# Altium PCB PCBPolyESP.PcbDoc (part 1 of 2)
Units mm, origin at the board's own origin, x right, y up, seen from the top; angles counter-clockwise.
Board outline 111.66 x 80.65 mm, 2 copper layers (Top Layer, Bottom Layer); 61 components, 47 nets, 234 pads, 117 vias.
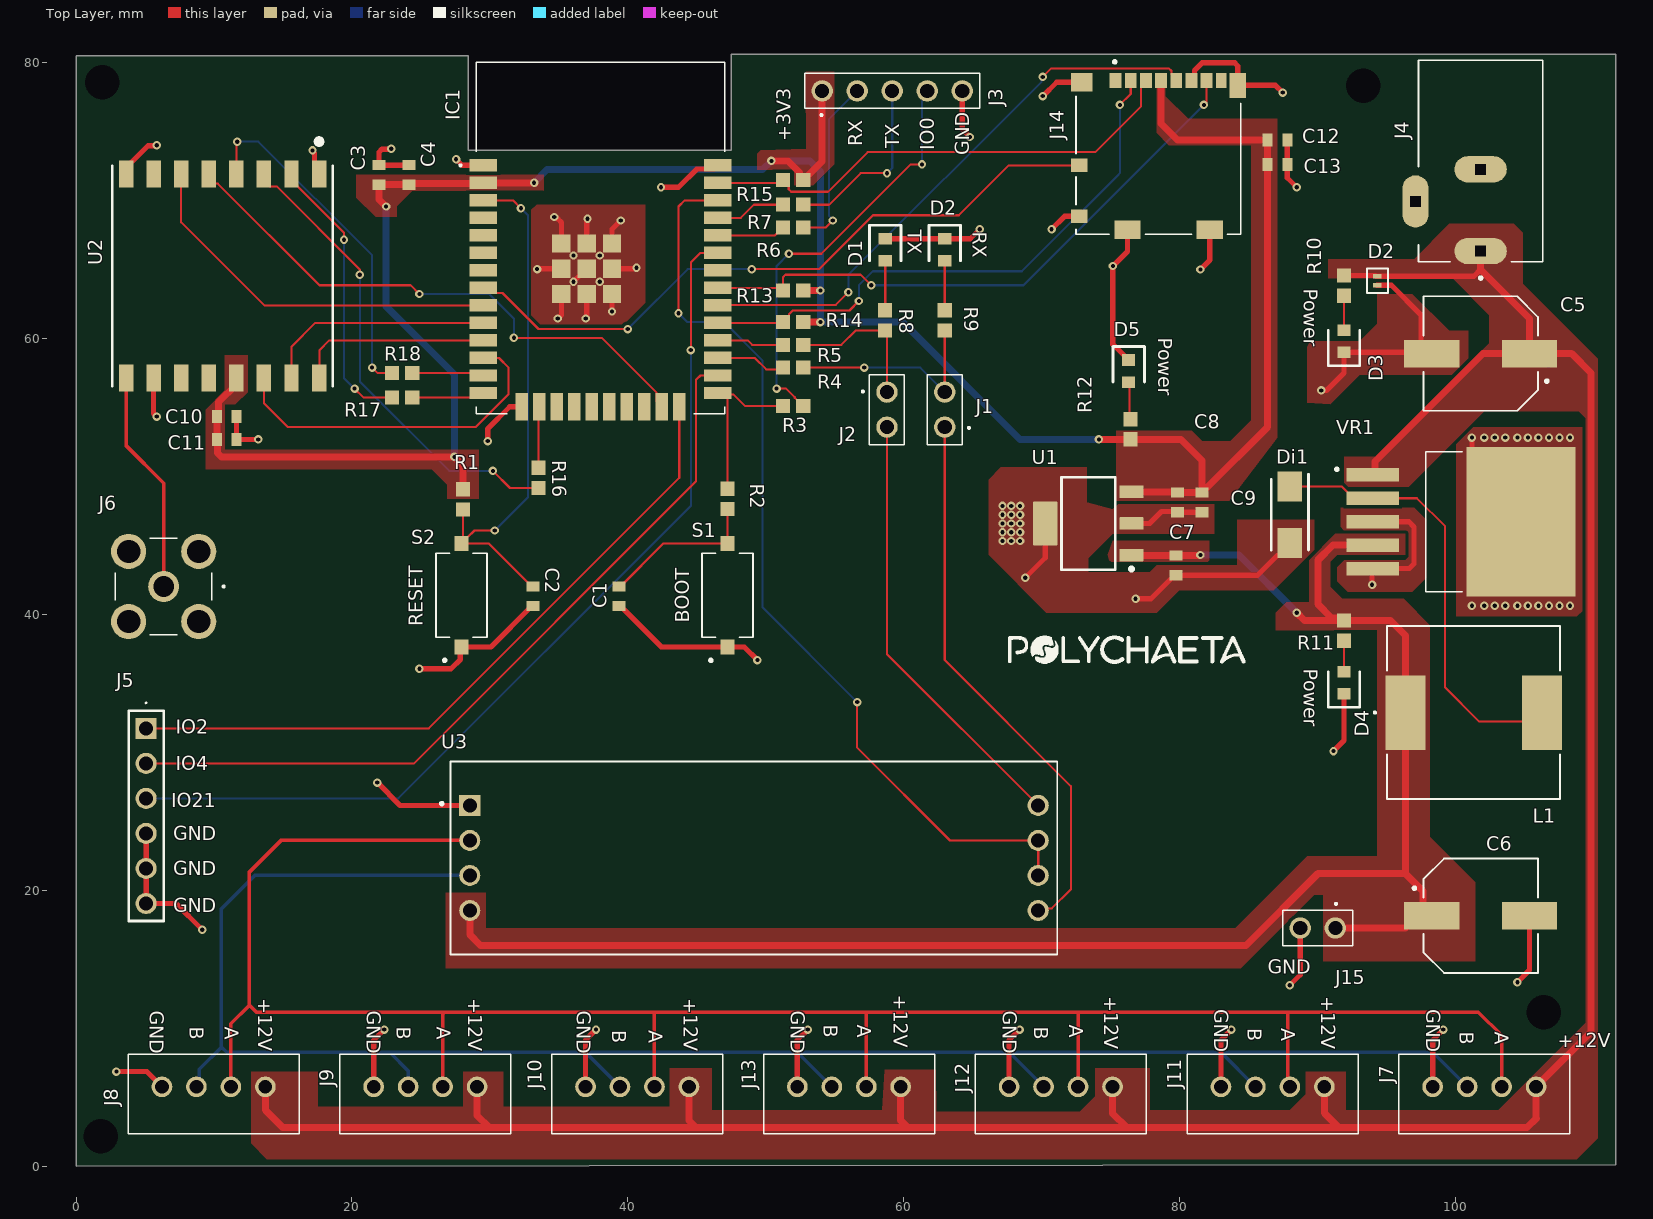
[diagram p0: Top Layer view]
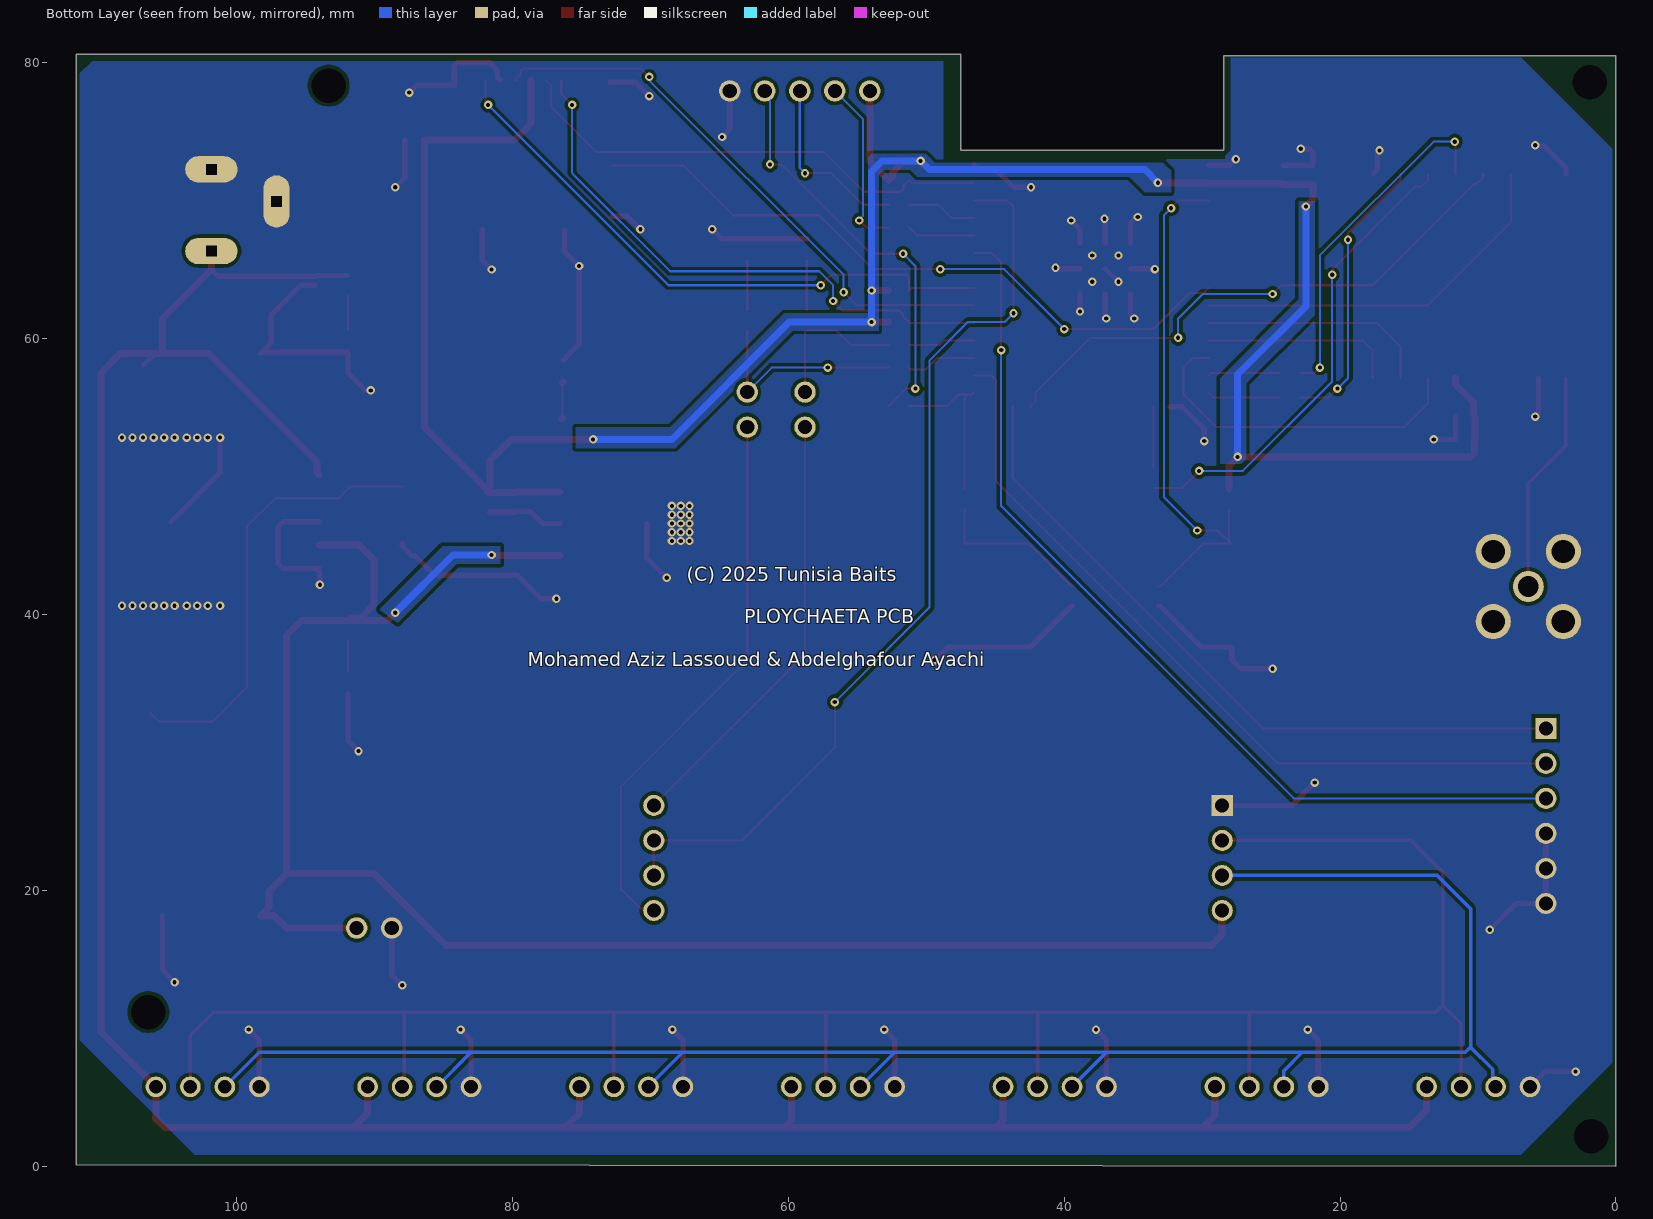
[diagram p1: Bottom Layer view, seen from below]
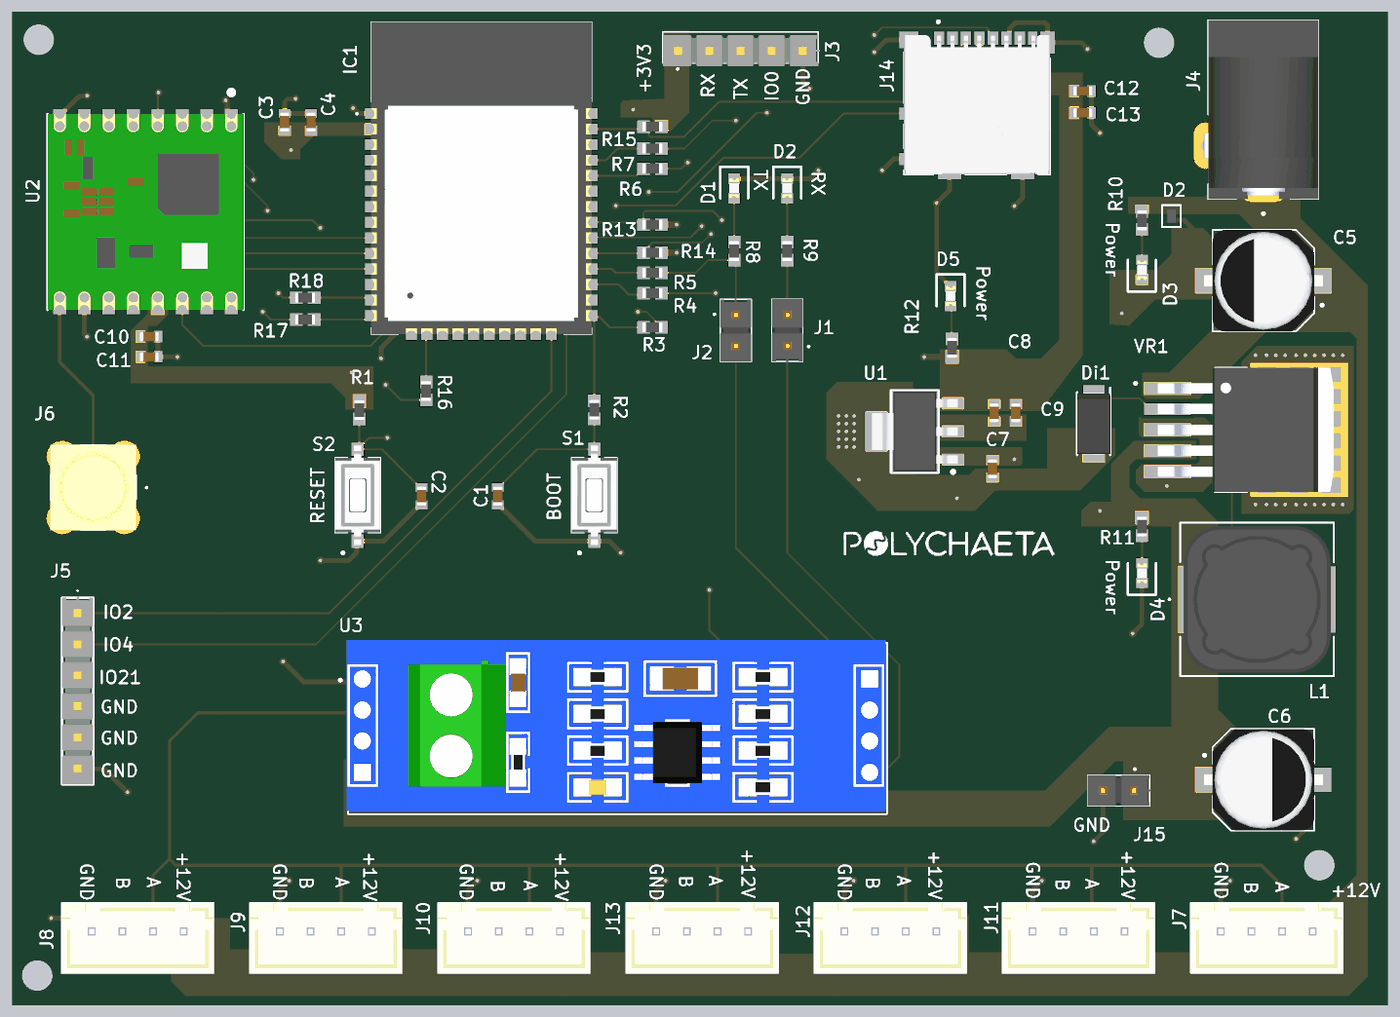
[diagram p2: 3D render of the assembled board from above, using the file's embedded part models]

## Layer stack, top to bottom
Top Solder: solder mask 0.0102, Solder Resist, Dk 3.5
Top Layer: signal copper 0.0356
Dielectric 1: dielectric 0.32, FR-4, Dk 4.8
Bottom Layer: signal copper 0.0356
Bottom Solder: solder mask 0.0102, Solder Resist, Dk 3.5

## Board outline
0,-0.001 0,80.517 28.448,80.517 28.448,73.66 47.498,73.66 47.498,80.645 110.744,80.645 111.662,80.645 111.662,0.089

## Design rules (kind name [scope] priority, off if disabled: settings)
Clearance [All] p1: gap=0.254 ignorepadtopadclearanceinfootprint=FALSE except(0.127: SMDPad-SMDPad)
HoleSize [All] p1: absolutevalues=TRUE maxlimit=3.05 minlimit=0.025 maxpercent=80.000 minpercent=20.000
MinimumSolderMaskSliver [All] p1: minsoldermaskwidth=0.148
PolygonConnect [All] p1: connectstyle=Direct reliefconductorwidth=0.254 reliefentries=4 polygonreliefangle="90 Angle" airgapwidth=0.254
RoutingVias [All] p1: holewidth=0.304 width=0.609 viastyle="Through Hole" minholewidth=0.304 minwidth=0.609 maxholewidth=0.304 maxwidth=0.609
SilkToSolderMaskClearance [IsPad] p1: minsilkscreentomaskgap=0.15 clearancetoexposedcopper=TRUE
SolderMaskExpansion [All] p1: expansion=0.051 istentingtop=FALSE
Width [All] p1: maxlimit=2.54 minlimit=0.152 preferedwidth=0.254 minimp=50.000000 maximp=50.000000 favimp=50.000000
27 further rules are at their usual default settings.

## Classes and differential pairs
component class Storage: C12 C13 J14 R13 R14 R15
component class Rs485: J7 J8 J9 J10 J11 J12 J13 U3
component class MCU: C1 C2 C3 C4 D2 Di1 IC1 J3 J5 R1 R2 R3 R4 R5 R6 R7 R8 R9 S1 S2
component class MainBlockConnection: J1 J2
component class Lora: C10 C11 J6 R16 R17 R18 U2
component class Designator: C5 C6 C7 C8 C9 D2 D3 D4 D5 Di1 J4 J15 L1 R10 R11 R12 U1 VR1

## Components (designator, comment, footprint, x,y, rotation, side; value= is the part's Value field where it differs from the comment)
C1 "0.1uF, 50V" CAPC1608X90N 39.37,41.327 r90 top
C2 "1uF, 35V" CAPC1608X90N 33.147,41.327 r90 top
C3 "0.1uF, 50V" CAPC1608X90N 21.971,71.882 r270 top
C4 "10uF, 10V" CAPC1608X90N 24.13,71.882 r90 top
C5 "EEEFT1V331AP" CAP_EEEFT1V331AP 101.854,58.928 r180 top
C6 "EEEFP1C331AP" CAP_EEEFP1C331AP 101.854,18.161 r0 top
C7 "4.7uF, 16V" CAPC1608X90N 79.756,43.561 r90 top
C8 "10uF, 10V" CAPC1608X90N 81.661,48.133 r90 top
C9 "10uF, 10V" CAPC1608X90N 79.883,48.133 r90 top
C10 "0.1uF, 10V" CAPC1608X90N 10.922,54.356 r180 top
C11 "10uF, 10V" CAPC1608X90N 10.922,52.705 r180 top
C12 "0.1uF, 10V" CAPC1608X90N 87.122,74.422 r180 top
C13 "10uF, 10V" CAPC1608X90N 87.122,72.644 r180 top
D1 "HSMG-C190" LEDC1608X90N 58.674,66.459 r270 top (schematic designator LED1)
D2 "HSMG-C190" LEDC1608X90N 62.992,66.459 r270 top (schematic designator LED2)
D2 "AQ3045-01ETG" SOD882 94.361,64.206 r90 top
D3 "Red" LEDC1608X90N 91.948,59.817 r90 top
D4 "Red" LEDC1608X90N 91.948,35.052 r90 top
D5 "Red" LEDC1608X90N 76.327,57.658 r270 top
Di1 "SS34-MS" DIOM5127X241N 88.011,47.244 r270 top (schematic designator D1)
IC1 "ESP32-WROOM-32D__4MB_PS_" ESP32WROOM32D4MBPS 38.027,67.321 r0 top
J1 "TSW-102-07-F-S" TSW-102-XX-YY-S 62.992,53.594 r90 top
J2 "TSW-102-07-F-S" TSW-102-XX-YY-S 58.801,56.134 r270 top
J3 "TSW-105-07-F-S" TSW-105-XX-YY-S 54.102,77.978 r0 top
J4 "EJ503A" MPD_EJ503A 101.854,72.898 r180 top
J5 "TSW-106-07-F-S" TSW10607FS 5.08,31.75 r270 top
J6 "901-144-8RFX" 9011448RFX 6.35,42.037 r0 top
J7 "B4B-XH-A_LF__SN_" B4BXHALFSN 105.878,5.757 r180 top
J8 "B4B-XH-A_LF__SN_" B4BXHALFSN 13.723,5.757 r180 top
J9 "B4B-XH-A_LF__SN_" B4BXHALFSN 29.082,5.757 r180 top
J10 "B4B-XH-A_LF__SN_" B4BXHALFSN 44.441,5.757 r180 top
J11 "B4B-XH-A_LF__SN_" B4BXHALFSN 90.519,5.757 r180 top
J12 "B4B-XH-A_LF__SN_" B4BXHALFSN 75.16,5.757 r180 top
J13 "B4B-XH-A_LF__SN_" B4BXHALFSN 59.801,5.757 r180 top
J14 "104031-0811" MOLEX_104031-0811 78.486,73.279 r180 top
J15 "TSW-102-07-F-S" TSW-102-XX-YY-S 91.313,17.272 r180 top
L1 "CDRH127/LDNP-470MC" IND_CDRH127/LDNP-470MC_SUM 101.346,32.893 r0 top
R1 "10K" RESC1607X60N 28.067,48.36 r90 top
R2 "27R" RESC1607X60N 47.244,48.387 r270 top
R3 "27R" RESC1607X60N 51.997,55.118 r0 top
R4 "0R" RESC1607X60N 51.997,57.912 r0 top
R5 "0R" RESC1607X60N 51.997,59.563 r0 top
R6 "0R" RESC1607X60N 51.997,68.072 r0 top
R7 "0R" RESC1607X60N 51.997,69.723 r0 top
R8 "1K" RESC1607X60N 58.674,61.341 r270 top
R9 "1K" RESC1607X60N 62.992,61.341 r270 top
R10 "1K" RESC1607X60N 91.948,63.854 r90 top
R11 "1K" RESC1607X60N 91.948,38.835 r90 top
R12 "1K" RESC1607X60N 76.454,53.44 r270 top
R13 "10K" RESC1607X60N 51.997,63.5 r0 top
R14 "10K" RESC1607X60N 51.997,61.214 r0 top
R15 "10K" RESC1607X60N 51.997,71.501 r0 top
R16 "27R" RESC1607X60N 33.528,49.911 r270 top
R17 "27R" RESC1607X60N 23.649,55.753 r180 top
R18 "27R" RESC1607X60N 23.649,57.531 r180 top
S1 "TS09-63-25-WT-160-SMT-TR" SW_TS09-63-25-WT-160-SMT-TR 47.244,41.402 r90 top
S2 "TS09-63-25-WT-160-SMT-TR" SW_TS09-63-25-WT-160-SMT-TR 27.94,41.402 r90 top
U1 "TL1963A-33DCYR" DCY0004A_N 73.406,46.609 r180 top
U2 "RFM95W-868S2" XCVR_RFM95W-868S2 10.62,64.55 r270 top
U3 "MAX485_MODULE_5V_LOGIC_TLL_TO_RS-485_CONVERTER" MODULE_MAX485_MODULE_5V_LOGIC_TLL_TO_RS-485_CONVERTER 49.149,22.352 r0 top
VR1 "LM2596S-5.0" TO170P1524X483-6N 100.425,46.736 r0 top

## Footprints (in the part's own frame and the unit in brackets; to place one, negate y for a bottom-side part, rotate by r counter-clockwise, add the part's x,y. Pads: shape width x height; smd on the part's side, far side on the other; paste and mask are expansions set on the pad)
9011448RFX [mm]
  round 2.25 hole 1.5: 1(0,0)
  round 2.55 hole 1.7: 2(-2.54,-2.54) 3(2.54,-2.54) 4(2.54,2.54) 5(-2.54,2.54)
  silkscreen extent -3.5,-3.5 4.4,3.5, body extent -3.5,-3.5 3.5,3.5, height 9.55
B4BXHALFSN [mm]
  round 1.5 hole 1: 1(0,0) 2(2.5,0) 3(5,0) 4(7.5,0)
  silkscreen extent -2.45,-2.35 9.95,3.4, body extent -2.45,-2.35 9.95,3.4, height 7.52
CAP_EEEFP1C331AP [mm]
  rect 4x2 smd: 1(-3.55,0) 2(3.55,0)
  silkscreen extent -4.9,-4.15 4.15,4.15, body extent -4.85,-4.15 4.85,4.15, height 10.2
CAP_EEEFT1V331AP [mm]
  rect 4x2 smd: 1(-3.55,0) 2(3.55,0)
  silkscreen extent -4.9,-4.15 4.15,4.15, body extent -4.85,-4.15 4.85,4.15, height 10.2
CAPC1608X90N [mm]
  rect 0.73x0.94 smd: 1(-0.71,0) 2(0.71,0)
  body extent -0.8,-0.4 0.8,0.4, height 0.9
DCY0004A_N [mm] "SOT223, 4-Leads, Body 6.7x3.7mm, Pitch 2.3mm, IPC Medium Density"
  rrect11% 1.75x0.9 smd: 1(-3.125,2.3) 2(-3.125,0) 3(-3.125,-2.3)
  rrect6% 1.75x3.2 smd: 4(3.125,0)
  silkscreen extent -3.25,-3.35 1.95,3.42, body extent -3.5,-3.25 3.5,3.25, height 1.62
DIOM5127X241N [mm]
  rect 2.2x1.75 smd: 1(-2.05,0) 2(2.05,0)
  silkscreen extent -2.93,-1.35 2.55,1.35, body extent -2.55,-1.35 2.55,1.35, height 2.41
ESP32WROOM32D4MBPS [mm]
  rect 2x0.9 smd: 1(-8.5,5.26) 2(-8.5,3.99) 3(-8.5,2.72) 4(-8.5,1.45) 5(-8.5,0.18) 6(-8.5,-1.09) 7(-8.5,-2.36) 8(-8.5,-3.63) 9(-8.5,-4.9) 10(-8.5,-6.17) 11(-8.5,-7.44) 12(-8.5,-8.71) 13(-8.5,-9.98) 14(-8.5,-11.25) 25(8.5,-11.25) 26(8.5,-9.98) 27(8.5,-8.71) 28(8.5,-7.44) 29(8.5,-6.17) 30(8.5,-4.9) 31(8.5,-3.63) 32(8.5,-2.36) 33(8.5,-1.09) 34(8.5,0.18) 35(8.5,1.45) 36(8.5,2.72) 37(8.5,3.99) 38(8.5,5.26)
  rect 0.9x2 smd: 15(-5.715,-12.25) 16(-4.445,-12.25) 17(-3.175,-12.25) 18(-1.905,-12.25) 19(-0.635,-12.25) 20(0.635,-12.25) 21(1.905,-12.25) 22(3.175,-12.25) 23(4.445,-12.25) 24(5.715,-12.25)
  rect 1.33x1.33 smd: 39(-2.835,-0.405) 40(-1,-0.405) 41(0.835,-0.405) 42(0.835,-2.24) 43(-1,-2.24) 44(-2.835,-2.24) 45(-2.835,-4.075) 46(-1,-4.075) 47(0.835,-4.075)
  silkscreen extent -10.2,-12.75 9,12.75, body extent -9,-12.75 9,12.75, height 3.1
IND_CDRH127/LDNP-470MC_SUM [mil]
  rect 114x213 smd: 1(-195,0) 2(195,0)
  silkscreen extent -285,-247 247,247, body extent -236,-236 236,236, height 315
LEDC1608X90N [mm]
  rect 0.85x0.95 smd: 1(-0.8,0) 2(0.8,0)
  silkscreen extent -1.78,-1.14 0.8,1.14, body extent -0.83,-0.4 0.77,0.4, height 0.8
MODULE_MAX485_MODULE_5V_LOGIC_TLL_TO_RS-485_CONVERTER [mm]
  rect 1.53x1.53 hole 1.02: 1(-20.6,3.81)
  round 1.53 hole 1.02: 2(-20.6,1.27) 3(-20.6,-1.27) 4(-20.6,-3.81) 5(20.62,-3.81) 6(20.62,-1.27) 7(20.62,1.27) 8(20.62,3.81)
  silkscreen extent -22.73,-7 22,7, body extent -22.13,-6.76 21.87,7.24, height 11
MOLEX_104031-0811 [mm]
  rect 0.85x1.1 smd: 1(3.105,-5.45) 2(2.005,-5.45) 3(0.905,-5.45) 4(-0.195,-5.45) 5(-1.295,-5.45) 6(-2.395,-5.45) 7(-3.495,-5.45)
  rect 0.75x1.1 smd: 8(-4.545,-5.45)
  rect 1.2x1 smd: 9(5.74,0.7) 10(5.74,4.4)
  rect 1.55x1.35 smd: G1(5.565,-5.325)
  rect 1.17x1.8 smd: G2(-5.755,-5.1)
  rect 1.9x1.35 smd: G3(-3.73,5.375) G4(2.24,5.375)
  silkscreen extent -5.97,-6.9 5.97,5.7, body extent -5.98,-5.72 5.97,5.69, height 1.43
MPD_EJ503A [mm]
  oval 3.8x1.9 hole 0.76 square: 1(0,6.54) 2(0,0.61)
  oval 1.9x3.8 hole 0.76 square: 3(4.73,2.94)
  silkscreen extent -4.5,-7.31 4.5,8.59, body extent -4.5,-7.31 4.88,7.31, height 11
RESC1607X60N [mm]
  rect 1.04x1.02 smd: 1(-0.735,0) 2(0.735,0)
  body extent -0.8,-0.4 0.8,0.4, height 0.55
SOD882 [mm]
  rect 0.35x0.6 smd: 1(-0.325,0) 2(0.325,0)
  silkscreen extent -0.89,-0.76 0.89,0.76, body extent -0.54,-0.34 0.54,0.34, height 0.44
SW_TS09-63-25-WT-160-SMT-TR [mm]
  rect 1.1x1 smd: 1(-3.75,0) 2(3.75,0)
  silkscreen extent -4.82,-1.85 3.05,1.85, body extent -4.05,-1.85 4.05,1.85, height 2.5
TO170P1524X483-6N [mm]
  rect 3.79x0.99 smd: 1(-6.4,3.4) 2(-6.4,1.7) 3(-6.4,0) 4(-6.4,-1.7) 5(-6.4,-3.4)
  rect 7.88x10.84 smd paste-6: 6(4.35,0)
  silkscreen extent -9.1,-5.08 0.09,5.08, body extent -7.18,-5.08 7.18,5.08, height 4.65
TSW10607FS [mm]
  rect 1.53x1.53 hole 1.02: 1(0,0)
  round 1.53 hole 1.02: 2(2.54,0) 3(5.08,0) 4(7.62,0) 5(10.16,0) 6(12.7,0)
  silkscreen extent -1.9,-1.27 13.97,1.27, body extent -1.42,-1.27 13.95,1.27, height 7.26
TSW-102-XX-YY-S [mm]
  round 1.55 hole 1.02: 1(0,0) 2(2.54,0)
  silkscreen extent -1.27,-1.8 3.81,1.27, body extent -1.39,-1.28 3.82,1.26, height 9.16
TSW-105-XX-YY-S [mm]
  round 1.55 hole 1.02: 1(0,0) 2(2.54,0) 3(5.08,0) 4(7.62,0) 5(10.16,0)
  silkscreen extent -1.27,-1.8 11.43,1.27, body extent -1.27,-1.52 11.56,1.02, height 5.85
XCVR_RFM95W-868S2 [mm]
  rect 1.95x1.05 smd: 1(-7.4,7) 2(-7.4,5) 3(-7.4,3) 4(-7.4,1) 5(-7.4,-1) 6(-7.4,-3) 7(-7.4,-5) 8(-7.4,-7) 9(7.4,-7) 10(7.4,-5) 11(7.4,-3) 12(7.4,-1) 13(7.4,1) 14(7.4,3) 15(7.4,5) 16(7.4,7)
  silkscreen extent -10.04,-8 8,8, body extent -8,-8 8,8, height 1.8

## Part data
C1 C3: library part CL10B104KB8NNNL, "CAP CER 0.1UF 50V X7R 0603", Arrow Part Number=CL10A106MP8NNNC, Manufacturer_Name=SAMSUNG, Mouser Part Number=187-CL10A106MP8NNNC, Arrow Price/Stock=https://www.arrow.com/en/products/cl10a106mp8nnnc/samsung-electro-mechanics?utm_currency=USD&region=europe, Datasheet Link=https://componentsearchengine.com/Datasheets/2/CL10A106MP8NNNC.pdf, Height=0.9mm, Manufacturer_Part_Number=CL10B104KB8NNNL, Mouser Price/Stock=https://www.mouser.co.uk/ProductDetail/Samsung-Electro-Mechanics/CL10A106MP8NNNC?qs=X6jEic%2FHinAgjcVTZfg7UA%3D%3D
C2: library part CL10A105KL8NNNC, "Ceramic Capacitor, Multilayer, Ceramic, 35V, 10% +Tol, 10% -Tol, X5R, +-15% TC, 1uF, Surface Mount, 0603 inch", Manufacturer=Samsung, Voltage Rating (DC)=35V, Category="Ceramic Capacitors", ComponentLink1Description=https://datasheet.ciiva.com/25773/cl10a105kl8nnnc-25773809.pdf?src-supplier=Digikey, ComponentLink1URL=https://datasheet.ciiva.com/25773/cl10a105kl8nnnc-25773809.pdf?src-supplier=Digikey, ComponentLink2Description=https://datasheet.ciiva.com/16202/clseries-16202344.pdf?src-supplier=Future+Electronics, ComponentLink2URL=https://datasheet.ciiva.com/16202/clseries-16202344.pdf?src-supplier=Future+Electronics, Height=900um, Lead Free=5697LeadFree, Manufacturer Part Number=CL10A105KL8NNNC, Material=4241ConductorMaterial, Pricing 1="1=0,13, 10=0,073, 100=0,044, 1000=0,03277 (USD)", RoHS=Yes, Stock 1=11037, Supplier 1=Digikey
C4 C8 C9 C11 C13: library part CL10A106MP8NNNC, "CAP CER 10UF 10V X5R 0603", Manufacturer_Name=SAMSUNG, Mouser Part Number=187-CL10A106MP8NNNC, Arrow Part Number=CL10A106MP8NNNC, Arrow Price/Stock=https://www.arrow.com/en/products/cl10a106mp8nnnc/samsung-electro-mechanics?utm_currency=USD&region=europe, Datasheet Link=https://componentsearchengine.com/Datasheets/2/CL10A106MP8NNNC.pdf, Height=0.9mm, Manufacturer_Part_Number=CL10A106MP8NNNC, Mouser Price/Stock=https://www.mouser.co.uk/ProductDetail/Samsung-Electro-Mechanics/CL10A106MP8NNNC?qs=X6jEic%2FHinAgjcVTZfg7UA%3D%3D
C5: "CAP ALUM 330UF 20% 35V SMD", Package="RADIAL-2 Panasonic", Check_prices=https://www.snapeda.com/parts/EEE-FT1V331AP/Panasonic/view-part/?ref=eda, MF="Panasonic Electronic", MP=EEE-FT1V331AP, SnapEDA_Link=https://www.snapeda.com/parts/EEE-FT1V331AP/Panasonic/view-part/?ref=snap
C6: "CAP ALUM 330UF 20% 16V SMD", Package="RADIAL-2 Panasonic", Check_prices=https://www.snapeda.com/parts/EEE-FP1C331AP/Panasonic/view-part/?ref=eda, MF="Panasonic Electronic", MP=EEE-FP1C331AP, SnapEDA_Link=https://www.snapeda.com/parts/EEE-FP1C331AP/Panasonic/view-part/?ref=snap
C7: library part CL10A475KO8NNNC, "CAP CER 4,7UF 16V X5R 0603", Arrow Part Number=CL10A106MP8NNNC, Manufacturer_Name=SAMSUNG, Mouser Part Number=187-CL10A106MP8NNNC, Arrow Price/Stock=https://www.arrow.com/en/products/cl10a106mp8nnnc/samsung-electro-mechanics?utm_currency=USD&region=europe, Datasheet Link=https://componentsearchengine.com/Datasheets/2/CL10A106MP8NNNC.pdf, Height=0.9mm, Manufacturer_Part_Number=CL10A475KO8NNNC, Mouser Price/Stock=https://www.mouser.co.uk/ProductDetail/Samsung-Electro-Mechanics/CL10A106MP8NNNC?qs=X6jEic%2FHinAgjcVTZfg7UA%3D%3D
C10 C12: library part C0603C104K8RACTU, "CAP CER 0.1UF 10V X7R 0603", Arrow Part Number=CL10A106MP8NNNC, Manufacturer_Name=KEMET, Mouser Part Number=187-CL10A106MP8NNNC, Arrow Price/Stock=https://www.arrow.com/en/products/cl10a106mp8nnnc/samsung-electro-mechanics?utm_currency=USD&region=europe, Datasheet Link=https://componentsearchengine.com/Datasheets/2/CL10A106MP8NNNC.pdf, Height=0.9mm, Manufacturer_Part_Number=C0603C104K8RACTU, Mouser Price/Stock=https://www.mouser.co.uk/ProductDetail/Samsung-Electro-Mechanics/CL10A106MP8NNNC?qs=X6jEic%2FHinAgjcVTZfg7UA%3D%3D
D1 D2: "Green LED 0603 (1608 Metric)", Manufacturer_Name="Avago Technologies", Mouser Part Number=630-HSMG-C190, Datasheet Link=https://docs.broadcom.com/docs/AV02-0551EN, Height=0.9mm, Manufacturer_Part_Number=HSMG-C190, Mouser Price/Stock=https://www.mouser.co.uk/ProductDetail/Broadcom-Avago/HSMG-C190?qs=YDL0qNrpDT605sxOaps8VQ%3D%3D
D2: "TVS DIODE 5.3VWM 12VC SOD882", LCSC Part Number=C3710326, Manufacturer=Littelfuse, Max Breakdown Voltage=9V, Max Operating Temperature=150°C, Min Breakdown Voltage=6.8V, Min Operating Temperature=-55°C, Non-rep Peak Rev Power Dis-Max=40W, Package Body Material=Plastic, Package Shape=Rectangular, Package Style="CHIP CARRIERMeter", Rep Pk Reverse Voltage-Max=5.3V, Supplier Part Number=F9321CT-ND, Category="TVS Diodes", ComponentLink1Description=https://datasheet.ciiva.com:443/pdfs/VipMasterIC/IC/LFSI/LFSI-S-A0007892042/LFSI-S-A0007892042-1.pdf?src-supplier=IHS+Markit, ComponentLink1URL=https://datasheet.ciiva.com:443/pdfs/VipMasterIC/IC/LFSI/LFSI-S-A0007892042/LFSI-S-A0007892042-1.pdf?src-supplier=IHS+Markit, ComponentLink2Description=https://www.littelfuse.com/~/media/electronics/datasheets/tvs_diode_arrays/littelfuse_tvs_diode_array_aq3045_datasheet.pdf.pdf?src-supplier=Digikey, ComponentLink2URL=https://www.littelfuse.com/~/media/electronics/datasheets/tvs_diode_arrays/littelfuse_tvs_diode_array_aq3045_datasheet.pdf.pdf?src-supplier=Digikey, ComponentLink3Description=http://www.littelfuse.com/~/media/electronics/datasheets/tvs_diode_arrays/littelfuse_tvs_diode_array_aq3045_datasheet.pdf.pdf?src-supplier=Digikey, ComponentLink3URL=http://www.littelfuse.com/~/media/electronics/datasheets/tvs_diode_arrays/littelfuse_tvs_diode_array_aq3045_datasheet.pdf.pdf?src-supplier=Digikey, Diode Element Material=SILICON, Diode Type="TRANS VOLTAGE SUPPRESSOR", Manufacturer Part Number=AQ3045-01ETG, Number of Elements=1, Pins=2, Polarity=Bidirectional, Pricing="1=0.5, 10=0.391, 100=0.2344, 500=0.217, 1000=0.14756, 2000=0.13585, 5000=0.1302 (USD)", Reach SVHC Compliant=Yes, Reference Standard=AEC-Q101, RoHS=Yes, RoHS Compliant=Yes, Stock=21664, Supplier=Digikey, Surface Mount=Yes, Technology=AVALANCHE, Terminal Form="No Lead", Terminal Position=BOTTOM
D3 D4 D5: library part HSMS-C190, "Red LED 0603 (1608 Metric)", Manufacturer_Name="Avago Technologies", Manufacturer_Part_Number=HSMG-C190, Mouser Part Number=630-HSMG-C190, Datasheet Link=https://docs.broadcom.com/docs/AV02-0551EN, Height=0.9mm, Mouser Price/Stock=https://www.mouser.co.uk/ProductDetail/Broadcom-Avago/HSMG-C190?qs=YDL0qNrpDT605sxOaps8VQ%3D%3D
Di1: "Schottky Diode", Manufacturer_Name=MSKSEMI, Datasheet Link=https://datasheet.lcsc.com/lcsc/2202131930_MSKSEMI-SS34-MS_C2836396.pdf, Height=2.41mm, Manufacturer_Part_Number=SS34-MS
IC1: "Integrated Circuit", Manufacturer_Name="Espressif Systems", Manufacturer_Part_Number="ESP32-WROOM-32D (4MB PS)", Mouser Part Number=356-ESPWROOM3200PS3, Datasheet Link=https://www.mouser.com/datasheet/2/891/esp32-wroom-32d_esp32-wroom-32u_datasheet_en-1365844.pdf, Height=3.2mm, Mouser Price/Stock=https://www.mouser.co.uk/ProductDetail/Espressif-Systems/ESP32-WROOM-32D-4MB-PS?qs=GBLSl2Akirs5uooPY1MBgw%3D%3D
J1 J2 J15: "Connector", Manufacturer_Name=SAMTEC, Mouser Part Number=200-TSW10207FS, Arrow Part Number=TSW-102-07-F-S, Arrow Price/Stock=https://www.arrow.com/en/products/tsw-102-07-f-s/samtec?utm_currency=USD&region=europe, Datasheet Link=http://suddendocs.samtec.com/prints/tsw-xxx-xx-xxx-x-xx-xxx-mkt.pdf, Manufacturer_Part_Number=TSW-102-07-F-S, Mouser Price/Stock=https://www.mouser.co.uk/ProductDetail/Samtec/TSW-102-07-F-S?qs=hzq9O0YpnZuC7JuvEqrjIA%3D%3D
J3: "Connector", Manufacturer_Name=SAMTEC, Mouser Part Number=200-TSW10507FS, Arrow Part Number=TSW-105-07-F-S, Arrow Price/Stock=https://www.arrow.com/en/products/tsw-105-07-f-s/samtec?region=europe, Datasheet Link=http://suddendocs.samtec.com/prints/tsw-xxx-xx-xxx-x-xx-xxx-mkt.pdf, Manufacturer_Part_Number=TSW-105-07-F-S, Mouser Price/Stock=https://www.mouser.co.uk/ProductDetail/Samtec/TSW-105-07-F-S?qs=rU5fayqh%252BE0rjSr2FD4jkw%3D%3D
J4: "Power Barrel Connector Jack 2.10mm ID (0.083), 5.50mm OD (0.217) Through Hole, Right Angle", Package=None, Availability="In Stock", Check_prices=https://www.snapeda.com/parts/EJ503A/MPD+%2528Memory+Protection+Devices%2529/view-part/?ref=eda, MF=MPD, MP=EJ503A, Price=None, Purchase-URL=https://pricing.snapeda.com/search?q=EJ503A&ref=eda, SnapEDA_Link=https://www.snapeda.com/parts/EJ503A/MPD+%2528Memory+Protection+Devices%2529/view-part/?ref=snap
J5: "Connector", Manufacturer_Name=SAMTEC, Mouser Part Number=200-TSW10607FS, Arrow Part Number=TSW-106-07-F-S, Arrow Price/Stock=https://www.arrow.com/en/products/tsw-106-07-f-s/samtec?region=nac, Datasheet Link=http://suddendocs.samtec.com/prints/tsw-xxx-xx-xxx-x-xx-xxx-mkt.pdf, Height=8.38mm, Manufacturer_Part_Number=TSW-106-07-F-S, Mouser Price/Stock=https://www.mouser.co.uk/ProductDetail/Samtec/TSW-106-07-F-S?qs=rU5fayqh%252BE1Xwj0%2Fe2Xn%2Fw%3D%3D
J6: "Connector", Manufacturer_Name=Amphenol, Mouser Part Number=523-901-144-8RFX, Arrow Part Number=901-144-8RFX, Arrow Price/Stock=https://www.arrow.com/en/products/901-144-8rfx/amphenol-rf?region=europe, Datasheet Link=https://componentsearchengine.com/Datasheets/1/901-144-8RFX.pdf, Height=9.53mm, Manufacturer_Part_Number=901-144-8RFX, Mouser Price/Stock=https://www.mouser.co.uk/ProductDetail/Amphenol-RF/901-144-8RFX?qs=jpOL8GWAqat%252BbPjbt8toTg%3D%3D
J7 J8 J9 J10 J11 J12 J13: "Connector", Arrow Part Number=B4B-XH-A(LF)(SN), Manufacturer_Name="JST (JAPAN SOLDERLESS TERMINALS)", Mouser Part Number=306-B4BXHALFSN, Arrow Price/Stock=https://www.arrow.com/en/products/b4b-xh-a-lf-sn/jst-manufacturing?utm_currency=USD&region=europe, Datasheet Link=https://datasheet.lcsc.com/szlcsc/JST-Sales-America-B4B-XH-A-LF-SN_C144395.pdf, Height=7mm, Manufacturer_Part_Number=B4B-XH-A(LF)(SN), Mouser Price/Stock=https://www.mouser.co.uk/ProductDetail/JST-Commercial/B4B-XH-ALFSN?qs=cdbOS8ANM9CfC08d%252BywhFw%3D%3D
J14: "Surface Mount Micro SD Card Connector, with Push In Termination", Package=None, Check_prices=https://www.snapeda.com/parts/104031-0811/Molex/view-part/?ref=eda, MF=Molex, MP=104031-0811, SnapEDA_Link=https://www.snapeda.com/parts/104031-0811/Molex/view-part/?ref=snap
L1: "Inductor Power Shielded Drum Core 47uH 20% 1KHz Ferrite 4.1A 0.078Ohm DCR T/R", Package="Non Standard Sumida", Check_prices=https://www.snapeda.com/parts/CDRH127/LDNP-470MC/Sumida/view-part/?ref=eda, MF="Sumida Corporation", MP=CDRH127/LDNP-470MC, SnapEDA_Link=https://www.snapeda.com/parts/CDRH127/LDNP-470MC/Sumida/view-part/?ref=snap
R1 R13 R14 R15: library part RC0603JR-0710KL, "RES 10K OHM 5% 1/10W 0603", Case/Package=0603, Manufacturer=Yageo, Max Operating Temperature=155°C, Max Power Dissipation=100mW, Min Operating Temperature=-55°C, Resistance=10kR, Temperature Coefficient=100ppm/°C, Tolerance=5%, Voltage Rating (AC)=50V, Category="Chip SMD Resistors", ComponentLink1Description=https://datasheet.ciiva.com/2452/pyu-rc-group-51-rohs-l-10-2452848.pdf?src-supplier=Digikey, ComponentLink1URL=https://datasheet.ciiva.com/2452/pyu-rc-group-51-rohs-l-10-2452848.pdf?src-supplier=Digikey, Lead Free=5697LeadFree, Manufacturer Part Number=RC0603JR-0710KL, Number of Terminations=2, Pricing 1="1=0,1, 10=0,008, 50=0,0072, 100=0,0061, 500=0,0051 (USD)", Reach SVHC Compliant=4187SVHC, RoHS=Yes, RoHS Compliant=Yes, Series=RC, Stock 1=50431, Supplier 1=Digikey
R2 R3 R16 R17 R18: library part RC0603JR-0727RL, "RES 27 OHM 5% 1/10W 0603", Manufacturer=Yageo, Voltage Rating (AC)=50V, Category="Chip SMD Resistors", ComponentLink1Description=https://datasheet.ciiva.com/7746/443971-7746479.pdf?src-supplier=Element14, ComponentLink1URL=https://datasheet.ciiva.com/7746/443971-7746479.pdf?src-supplier=Element14, Lead Free=5697LeadFree, Manufacturer Part Number=RC0603JR-0727RL, Pricing 1="1=0,1, 10=0,008, 50=0,0072, 100=0,0061, 500=0,00562, 1000=0,0051 (USD)", RoHS=Yes, Stock 1=235857, Supplier 1=Digikey
R4 R5 R6 R7: library part RC0603JR-070RL, "RES 0 OHM JUMPER 1/10W 0603", Case Code (Imperial)=0603, Case Code (Metric)=1608, Manufacturer=Yageo, Max Operating Temperature=155°C, Max Power Dissipation=100mW, Min Operating Temperature=-55°C, Package Quantity=5000, Resistance=0mR, Resistance Tolerance=5%, Resistor Type="Thick Film", Temperature Coefficient=200ppm/°C, Tolerance=1%, Voltage Rating=50V, Case/Package=0603, Category="Chip SMD Resistors", ComponentLink1Description=https://datasheet.ciiva.com/11808/pyu-r-int-6-11808700.pdf?src-supplier=Rs, ComponentLink1URL=https://datasheet.ciiva.com/11808/pyu-r-int-6-11808700.pdf?src-supplier=Rs, ComponentLink2Description=https://datasheet.ciiva.com/22747/443971-22747530.pdf?src-supplier=Element14, ComponentLink2URL=https://datasheet.ciiva.com/22747/443971-22747530.pdf?src-supplier=Element14, ComponentLink3Description=https://datasheet.ciiva.com/12555/rc0603-272842-12555254.pdf?src-supplier=Mouser, ComponentLink3URL=https://datasheet.ciiva.com/12555/rc0603-272842-12555254.pdf?src-supplier=Mouser, ComponentLink4Description=https://datasheet.ciiva.com/7746/1738695-7746421.pdf?src-supplier=Element14, ComponentLink4URL=https://datasheet.ciiva.com/7746/1738695-7746421.pdf?src-supplier=Element14, ComponentLink5Description=https://datasheet.ciiva.com/7746/1738695-7746422.pdf?src-supplier=Element14, ComponentLink5URL=https://datasheet.ciiva.com/7746/1738695-7746422.pdf?src-supplier=Element14, Construction=Rectangular, Contact Plating=Tin,Matte, Depth=0.8mm, Features="Moisture Resistant", Height=0.45mm, Lead Free=5697LeadFree, Length=1.6mm, Manufacturer Part Number=RC0603JR-070RL, Military Standard=Not, Number of Pins=2, Number of Terminations=2, Packaging="Tape and Reel", Power Rating=100mW, Pricing 1="1=0,1, 10=0,01, 25=0,008, 50=0,0068, 100=0,0059, 250=0,00496, 500=0,00436, 1000=0,00384, 5000=0,00292, 10000=0,00262, 15000=0,00246, 25000=0,00229, 35000=0,00218, 50000=0,00208, 125000=0,00185, 250000=0,00171, 500000=0,00159 (USD)", Reach SVHC Compliant=Unknown, RoHS=Yes, RoHS Compliant=Yes, Series=RC, Size Code=0603, Stock 1=2438419, Supplier 1=Digikey, Technology="THICK FILM", Termination=SMD/SMT, Voltage Rating (DC)=50V, Width=0.8mm
R8 R9 R10 R11 R12: library part RT0603BRD071KL, "Fixed Resistor, Thin Film, 0.1W, 1000ohm, 75V, 0.1% +/-Tol, 25ppm/Cel, Surface Mount, 0603", Case Code (Imperial)=0603, Case Code (Metric)=1608, Manufacturer=Yageo, Max Operating Temperature=155°C, Max Power Dissipation=100mW, Min Operating Temperature=-55°C, Package Quantity=5000, Resistance=1kR, Temperature Coefficient=25ppm/°C, Voltage Rating=75V, Voltage Rating (DC)=50V, Case/Package=0603, Category="Chip SMD Resistors", ComponentLink1Description=https://datasheet.ciiva.com/11819/0900766b8079c86e-11819652.pdf?src-supplier=Rs, ComponentLink1URL=https://datasheet.ciiva.com/11819/0900766b8079c86e-11819652.pdf?src-supplier=Rs, ComponentLink2Description=https://datasheet.ciiva.com/5624/pyu-rt-1-to-0-05-rohs-l-4-5624759.pdf?src-supplier=Mouser, ComponentLink2URL=https://datasheet.ciiva.com/5624/pyu-rt-1-to-0-05-rohs-l-4-5624759.pdf?src-supplier=Mouser, Contact Plating=Tin,Lead, Depth=0.8mm, Features="Moisture Resistant", Height=0.022inch, Lead Free=5697LeadFree, Length=0.063inch, Manufacturer Part Number=RT0603BRD071KL, Mount="Surface Mount", Number of Terminations=2, Packaging="Tape and Reel", Power Rating=100mW, Pricing 1="1=0,15, 10=0,108, 50=0,0868, 100=0,0775, 500=0,06018, 1000=0,05202 (USD)", RoHS=Yes, RoHS Compliant=Yes, Series=RT, Size Code=0603, Stock 1=60333, Supplier 1=Digikey, Technology="THIN FILM", Termination=SMD/SMT, Width=0.031inch
S1 S2: "SWITCH TACTILE SPST-NO 0.05A 12V", Package=None, Check_prices=https://www.snapeda.com/parts/TS09-63-25-WT-160-SMT-TR/Same+Sky/view-part/?ref=eda, MF="Same Sky", MP=TS09-63-25-WT-160-SMT-TR, SnapEDA_Link=https://www.snapeda.com/parts/TS09-63-25-WT-160-SMT-TR/Same+Sky/view-part/?ref=snap
U1: "IC REG LINEAR 3.3V 1.5A SOT223-4", Case/Package=SOP, Dropout Voltage1-Max=550mV, Dropout Voltage1-Nom=340mV, Input Voltage Absolute-Max=20V, LCSC Part Number=C181262, Manufacturer="Texas Instruments", Min Input Voltage=3.8V, Operating Temperature, TJ-Max=125°C, Operating Temperature, TJ-Min=-40°C, Output Current1-Max=1.5A, Output Voltage1-Max=3.4V, Output Voltage1-Min=3.2V, Output Voltage1-Nom=3.3V, Package Body Material=Plastic, Package Shape=Rectangular, Package Style="SMALL OUTLINEMeter", Peak Reflow Temperature (Cel)=260°C, Supplier Part Number=296-24897-1-ND, Voltage Tolerance-Max=3%, Adjustability=FIXED, Category="Voltage Regulators - Linear", Channels=1, ComponentLink1Description=https://www.ti.com:443/lit/ds/symlink/tl1963a.pdf?src-supplier=IHS+Markit, ComponentLink1URL=https://www.ti.com:443/lit/ds/symlink/tl1963a.pdf?src-supplier=IHS+Markit, ComponentLink2Description=https://datasheet.ciiva.com/2046/-2046068.pdf?src-supplier=Digikey, ComponentLink2URL=https://datasheet.ciiva.com/2046/-2046068.pdf?src-supplier=Digikey, Height - Seated (Max)=1.8mm, JESD-30 Code=R-PDSO-G4, JESD-609 Code=e3, Length=6.5mm, Line Regulation-Max=0.01%, Load Regulation-Max=0.07%, Manufacturer Part Number=TL1963A-33DCYR, Max Supply Voltage=20V, Moisture Sensitivity Level=2, Number of Outputs=1, Packaging="Tape and Reel", Pins=4, Pricing="1=2.91, 10=2.614, 25=2.4712, 100=2.1417, 250=2.03188, 500=1.8232, 1000=1.53764 (USD)", Qualification Status="Not Qualified", Reach SVHC Compliant=Yes, Regulator Type="FIXED POSITIVE SINGLE OUTPUT LDO REGULATOR", RoHS=Yes, RoHS Compliant=Yes, Stock=4105, Supplier=Digikey, Surface Mount=Yes, Technology=BIPOLAR, Terminal Finish=Tin, Terminal Form="Gull Wing", Terminal Pitch=2.3mm, Terminal Position=DUAL, Width=3.5mm
U2: "General ISM < 1GHz LoRaâ„¢ Transceiver Module 868MHz Antenna Not Included Surface Mount", Package="Non Standard RF Solutions", Availability="In Stock", Check_prices=https://www.snapeda.com/parts/RFM95W-868S2/RF+Solutions/view-part/?ref=eda, MF=RF, MP=RFM95W-868S2, Price=None, Purchase-URL=https://pricing.snapeda.com/search?q=RFM95W-868S2&ref=eda, SnapEDA_Link=https://www.snapeda.com/parts/RFM95W-868S2/RF+Solutions/view-part/?ref=snap
U3: "5V MAX485 TTL To RS485 Converter Module Board for Arduino", Package=Package, Availability="Not in stock", Check_prices=https://www.snapeda.com/parts/MAX485%20Module%205V%20logic%20TLL%20to%20RS-485%20converter/e-Gizmo+Mechatronix+Central/view-part/?ref=eda, MF="e-Gizmo Mechatronix Central", MP="MAX485 Module 5V logic TLL to RS-485 converter", Price=None, SnapEDA_Link=https://www.snapeda.com/parts/MAX485%20Module%205V%20logic%20TLL%20to%20RS-485%20converter/e-Gizmo+Mechatronix+Central/view-part/?ref=snap
VR1: "SIMPLE SWITCHERÂ® 4.5V to 40V, 3A Low Component Count Step-Down Regulator", Package="TO-263-5 Texas Instruments", Check_prices=https://www.snapeda.com/parts/LM2596S-5.0/NOPB/Texas+Instruments/view-part/?ref=eda, MF="Texas Instruments", MP=LM2596S-5.0/NOPB, SnapEDA_Link=https://www.snapeda.com/parts/LM2596S-5.0/NOPB/Texas+Instruments/view-part/?ref=snap

## Free pads (board coordinates)
  round 1.524 hole 2.5 unplated: 3(1.778,2.159) 3(1.905,78.613) 3(93.345,78.359) 3(106.426,11.176)

## Via types
v1: diameter 0.609, hole 0.304, Top Layer to Bottom Layer, tented both sides, 117 vias

## Nets (pads, with @x,y where several pads share a name; then routed paths per layer and width w, separated by ;. In a path a pad name is that pad's centre, name@x,y a point inside that pad or via, vN(x,y) a via of type N, cw(c..) or ccw(c..) an arc to the next point about the centre after c; other vN are vias at no path point)
+3V3: C3.2 C4.1 C8.2 C9.2 C10.2 C11.2 C12.2 C13.2 IC1.2 J3.1 J14.4 R1.2 R12.2 R13.2 R14.2 R15.2 U1.3 U2.13 | length 182.8
  Top Layer w0.508: U2.13 11.62,56.7 10.323,55.403 10.323,54.467 C10.2 C11.2 10.243,52.674 10.243,51.733 10.541,51.435 v1(27.432,51.435) 27.432,51.408 28.067,50.773 R1.2 ; v1(22.479,69.596) 21.971,70.104 C3.2 C4.1 24.205,71.247 29.463,71.247 IC1.2 v1(33.21,71.311) v1@33.274,71.247 ; v1(50.419,72.898) 51.613,72.898 52.466,72.045 52.466,71.757 52.722,71.501 R15.2 52.742,71.501 54.102,72.861 J3.1 ; R14.2 v1(53.975,61.214) ; R13.2 v1(53.975,63.5) ; v1(74.168,52.705) R12.2 80.137,52.705 81.661,51.181 C8.2 ; U1.3@76.564,48.876 79.85,48.876 C9.2 C8.2 ; J14.4 78.681,75.624 79.883,74.422 C12.2 C13.2 86.412,53.594 81.877,49.059 81.877,48.954 81.766,48.843 C8.2
  Bottom Layer w0.508: v1(22.479,69.596) 22.479,62.357 27.432,57.404 v1(27.432,51.435) ; v1(33.21,71.311) 34.162,72.263 49.784,72.263 v1(50.419,72.898) 53.213,72.898 53.975,72.136 v1(53.975,63.5) v1(53.975,61.214) 59.944,61.214 68.453,52.705 v1(74.168,52.705)
+5V: C6.1 C7.2 J15.1 L1.1 R11.2 U1.1 U3.4 VR1.4 | length 132.9
  Top Layer w0.508: U3.4 28.549,16.79 29.337,16.002 84.836,16.002 90.043,21.209 96.393,21.209 ; U1.1@76.55,44.29 79.737,44.29 C7.2 81.482,44.271 v1(81.534,44.323) ; v1(88.519,40.132) 89.081,39.57 R11.2 ; J15.1 96.415,17.272 97.304,18.161 C6.1 97.663,18.802 97.663,19.939 96.393,21.209 ; VR1.4 91.137,45.036 90.043,43.942 90.043,40.767 91.048,39.762 91.756,39.762 R11.2 ; R11.2 95.304,39.57 96.393,38.481 L1.1 96.393,21.209
  Bottom Layer w0.508: v1(81.534,44.323) 84.328,44.323 v1(88.519,40.132)
+12V: C5.1 D2.2@94.361,64.531 J4.1 J7.1 J8.1 J9.1 J10.1 J11.1 J12.1 J13.1 R10.2 VR1.1 | length 207.6
  Top Layer w0.381: R10.2 94.209,64.589 94.267,64.531 94.361,64.531 101.361,64.531 101.854,65.024 ; C5.1@105.943,58.928 C5.1@106.752,58.118
  Top Layer w0.508: J8.1 13.723,4.057 14.986,2.794 29.972,2.794 ; J9.1 29.082,3.684 29.972,2.794 ; J10.1 44.441,3.311 44.958,2.794 ; J13.1 59.801,3.318 60.325,2.794 ; J12.1 75.16,3.834 76.2,2.794 ; J11.1 90.519,3.842 91.567,2.794 ; VR1.1@94.034,50.136 94.19,50.291 94.19,51.095 102.022,58.928 C5.1 ; J4.1 101.854,65.024 105.404,61.474 C5.1 ; 29.972,2.794 44.958,2.794 ; 44.958,2.794 60.325,2.794 ; 60.325,2.794 76.2,2.794 ; 76.2,2.794 91.567,2.794 ; 91.567,2.794 105.221,2.794 105.887,3.46 105.878,3.469 J7.1 109.855,9.734 109.855,57.531 108.458,58.928 105.943,58.928 C5.1
A: J7.2 J8.2 J9.2 J10.2 J11.2 J12.2 J13.2 U3.2 | length 155.7
  Top Layer w0.254: J8.2 11.223,10.334 12.573,11.684 ; J9.2 26.582,11.027 26.731,11.176 ; U3.2 14.859,23.622 12.573,21.336 12.573,11.684 ; J10.2 41.941,11.176 ; J13.2 57.301,11.176 ; J12.2 72.66,11.176 ; J11.2 87.849,5.927 87.849,11.176 ; J7.2 103.378,9.486 101.688,11.176 87.849,11.176 ; 12.573,11.684 13.081,11.176 26.731,11.176 ; 26.731,11.176 41.941,11.176 ; 41.941,11.176 57.301,11.176 ; 57.301,11.176 72.66,11.176 ; 72.66,11.176 87.849,11.176
ANT: J6.1 U2.9 | length 16.2
  Top Layer w0.254: U2.9 3.62,52.26 6.35,49.53 J6.1
B: J7.3 J8.3 J9.3 J10.3 J11.3 J12.3 J13.3 U3.3 | length 141.4
  Bottom Layer w0.254: J8.3 8.929,5.963 8.929,7.024 10.541,8.636 ; J9.3 24.082,6.906 22.733,8.255 ; U3.3 12.954,21.082 10.541,18.669 10.541,8.636 ; J10.3 36.943,8.255 ; J13.3 52.302,8.255 ; J12.3 67.662,8.255 ; J11.3 83.021,8.255 ; J7.3 98.38,8.255 83.021,8.255 ; 10.541,8.636 10.922,8.255 22.733,8.255 ; 22.733,8.255 36.943,8.255 ; 36.943,8.255 52.302,8.255 ; 52.302,8.255 67.662,8.255 ; 67.662,8.255 83.021,8.255
BTN_GPIO0: C1.2 R2.2 S1.2 | length 11.7
  Top Layer w0.152: C1.2 39.475,42.037 42.59,45.152 S1.2 R2.2
CON_GPIO0: J3.4 R3.2 | length 30.5
  Top Layer w0.152: v1(50.8,56.388) 51.489,56.388 52.112,55.765 52.112,55.728 52.722,55.118 R3.2 ; v1(51.689,66.167) 54.037,66.167 60.514,72.644 v1(61.341,72.644)
  Bottom Layer w0.152: v1(50.8,56.388) 50.8,65.278 v1(51.689,66.167) ; v1(61.341,72.644) 61.341,77.219 61.722,77.6 J3.4
EN: C2.2 IC1.3 R1.1 S2.2 | length 39.2
  Top Layer w0.152: R1.1 S2.2@28.067,45.329 ; IC1.3 31.686,70.041 v1(32.258,69.469) ; v1(30.353,46.101) 28.889,46.101 28.414,45.626 28.364,45.626 S2.2@28.067,45.329 ; C2.2 33.042,42.037 29.927,45.152 S2.2 27.94,45.202 S2.2@28.067,45.329
  Bottom Layer w0.152: v1(30.353,46.101) 32.766,48.514 32.766,68.961 v1(32.258,69.469)
ESP_RX: J1.2 R4.2 R9.2 | length 15.5
  Top Layer w0.152: R4.2 v1(57.15,57.912) ; J1.2 R9.2
  Bottom Layer w0.152: v1(57.15,57.912) 61.214,57.912 J1.2
ESP_TX: J2.1 R5.2 R8.2 | length 10.9
  Top Layer w0.152: R5.2 55.499,59.563 56.542,60.606 R8.2 58.801,60.479 J2.1
GND: C1.1 C2.1 C3.1 C4.2 C5.2 C6.2 C7.1 C8.1 C9.1 C10.1 C11.1 C12.1 C13.1 D1.1 D2.1 D3.1 D4.1 D5.1 Di1.2 IC1.1 IC1.15 IC1.38 IC1.39 IC1.40 IC1.41 IC1.42 IC1.43 IC1.44 IC1.45 IC1.46 IC1.47 J3.5 J4.2 J4.3 J5.4 J5.5 J5.6 J6.2 J6.3 J6.4 J6.5 J7.4 J8.4 J9.4 J10.4 J11.4 J12.4 J13.4 J14.6 J14.10 J14.G1 J14.G2 J14.G3 J14.G4 J15.2 S1.1 S2.1 U1.2 U1.4 U2.1 U2.8 U2.10 U3.1 VR1.3 VR1.5 VR1.6 | length 228.8
  Top Layer w0.381: v1(2.921,6.858) 5.122,6.858 J8.4 ; U2.8 3.62,72.4 5.217,73.997 5.798,73.997 v1(5.842,74.041) ; J5.4 J5.5 J5.6 7.239,19.05 v1(9.144,17.145) ; U2.10 5.62,54.578 v1(5.842,54.356) ; C10.1 C11.1 v1(13.208,52.705) ; v1(17.145,73.66) 17.145,73.598 17.286,73.458 17.286,72.285 U2.1 ; J9.4 21.582,9.144 v1(22.344,9.906) ; v1(21.844,27.813) 23.495,26.162 U3.1 ; v1(22.86,73.787) 22.825,73.752 22.194,73.752 21.971,73.529 C3.1 C4.2 ; v1(24.892,36.068) 27.178,36.068 27.864,36.754 27.864,37.576 S2.1 30.077,37.652 33.042,40.617 C2.1 ; v1(27.559,73.025) 28.003,72.581 IC1.1 ; v1(29.845,52.578) 29.845,53.467 31.449,55.071 IC1.15 ; v1@33.401,65.024 v1(33.43,65.053) 33.458,65.081 IC1.44 ; v1(34.925,61.468) 35.192,61.735 IC1.45 ; v1@34.925,68.707 35.192,68.44 IC1.39 ; v1(36.068,64.135) 36.081,64.135 IC1.43 ; J10.4 36.941,9.144 v1(37.703,9.906) ; v1(36.957,61.468) 37.027,61.538 IC1.46 ; IC1.40 37.027,68.65 v1(37.084,68.707) ; v1(38.862,61.976) IC1.47 ; IC1.42 40.57,65.081 v1(40.64,65.151) ; IC1.41 38.862,67.945 v1(39.497,68.58) ; C1.1 39.475,40.617 42.44,37.652 S1.1 48.454,37.652 v1(49.403,36.703) ; v1(42.418,70.993) 43.688,70.993 45.016,72.321 46.267,72.321 IC1.38 ; J13.4 52.3,9.144 v1(53.062,9.906) ; D1.1 62.992,67.259 64.846,67.259 v1(65.532,67.945) ; J3.5 64.262,75.184 v1(64.815,74.631) ; J12.4 67.66,9.144 v1(68.422,9.906) ; v1(68.834,42.672) 70.281,44.119 U1.4 ; v1(70.104,77.597) 71.111,78.604 J14.G1 ; v1(70.739,67.945) 71.673,68.879 J14.10 ; J14.G4 76.246,66.34 v1(75.184,65.278) 75.184,59.601 76.042,58.743 76.042,58.693 76.277,58.458 D5.1 ; U1.2 77.851,46.609 78.709,47.467 79.839,47.467 C9.1 C8.1 ; v1(76.835,41.148) 77.948,41.148 79.651,42.851 C7.1 85.668,42.851 87.101,44.284 87.327,44.284 88.011,44.969 Di1.2 ; J14.6 81.111,78.959 81.111,79.463 81.658,80.01 84.018,80.01 84.241,79.787 J14.G2 86.975,78.379 v1(87.503,77.851) ; v1(81.534,65.024) 82.216,65.706 J14.G3 ; J11.4 83.019,9.144 v1(83.781,9.906) ; C12.1 C13.1 87.832,71.68 v1(88.519,70.993) ; v1(88.011,13.123) 88.773,13.885 J15.2 ; v1(90.297,56.261) 90.678,56.261 91.948,57.531 D3.1 C5.2@98.215,59.017 ; v1(91.186,30.103) 91.948,30.865 D4.1 ; v1(93.98,42.164) 93.98,43.031 94.285,43.336 VR1.5@95.152,43.336 ; VR1.5 VR1.5@95.152,43.336 ; VR1.3 96.647,46.736 97.028,46.355 97.028,43.688 96.676,43.336 VR1.5@95.152,43.336 ; D2.1@94.361,63.881 95.377,63.881 97.536,61.722 97.536,59.696 C5.2@98.215,59.017 ; C5.2 C5.2@98.215,59.017 ; J7.4 98.378,9.144 v1(99.14,9.906) ; J4.2@100.976,72.288 J4.2 ; v1(101.219,52.832) 101.219,50.292 VR1.6 ; v1(104.521,13.335) 105.404,14.218 C6.2
  other v1: 101.219,40.64 102.108,40.64 102.87,40.64 103.632,40.64 104.521,40.64 105.283,40.64 106.045,40.64 106.807,40.64 107.569,40.64 108.331,40.64 67.183,45.339 67.818,45.339 68.453,45.339 67.183,45.974 67.818,45.974 68.453,45.974 67.183,46.609 67.818,46.609 68.453,46.609 67.183,47.244 67.818,47.244 68.453,47.244 67.183,47.879 67.818,47.879 68.453,47.879 102.108,52.832 102.87,52.832 103.632,52.832 104.521,52.832 105.283,52.832 106.045,52.832 106.807,52.832 107.569,52.832 108.331,52.832 37.973,64.135 36.068,66.04 37.973,66.04 34.671,68.834
GPIO0: IC1.25 R2.1 R3.1 | length 12.1
  Top Layer w0.152: IC1.25 46.616,56.071 46.721,55.966 IC1.25@46.936,55.966 ; R2.1 47.244,55.697 46.975,55.966 IC1.25@46.936,55.966 ; R3.1 48.514,55.118 47.666,55.966 IC1.25@46.936,55.966
GPIO2: IC1.24 J5.1 | length 51.3
  Top Layer w0.152: J5.1 25.582,31.75 43.742,49.91 IC1.24
GPIO4: IC1.26 J5.2 | length 57.4
  Top Layer w0.152: J5.2 24.511,29.21 44.958,49.657 44.958,57.023 45.276,57.341 IC1.26
GPIO21: IC1.33 J5.3 | length 68.2
  Top Layer w0.152: v1(44.577,59.182) 44.577,65.532 45.276,66.231 IC1.33
  Bottom Layer w0.152: J5.3 23.368,26.67 44.577,47.879 v1(44.577,59.182)
NetD1_1: Di1.1 L1.2 VR1.2 | length 32.5
  Top Layer w0.152: Di1.1 91.767,49.294 92.625,48.436 VR1.2 97.233,48.436 99.276,46.393 99.276,34.709 101.727,32.258 105.664,32.258 L1.2
NetD3_2: D3.2 R10.1 | length 2.5
  Top Layer w0.152: D3.2 R10.1
NetD4_2: D4.2 R11.1 | length 2.2
  Top Layer w0.152: D4.2 R11.1
NetD5_2: D5.2 R12.1 | length 2.7
  Top Layer w0.152: R12.1@76.391,54.238 D5.2@76.391,56.794
  Top Layer w0.508: D5.2 D5.2@76.391,56.794 ; R12.1@76.391,54.238 R12.1
NetIC1_8: IC1.8 J14.9 | length 49.4
  Top Layer w0.152: IC1.8 29.901,63.317 30.917,63.317 33.528,60.706 v1(40.005,60.706) ; v1(49.002,65.049) 53.873,65.049 57.785,68.961 64.008,68.961 67.626,72.579 J14.9
  Bottom Layer w0.152: v1(40.005,60.706) 44.348,65.049 v1(49.002,65.049)
NetIC1_9: IC1.9 U2.6 | length 27.9
  Top Layer w0.152: U2.6 7.62,68.453 13.652,62.421 IC1.9
NetIC1_10: IC1.10 U2.15 | length 16.9
  Top Layer w0.152: U2.15 15.62,59.435 17.336,61.151 IC1.10
NetIC1_11: IC1.11 U2.16 | length 14.2
  Top Layer w0.152: U2.16 17.653,57.183 17.653,59.182 18.352,59.881 IC1.11
NetIC1_12: IC1.12 U2.14 | length 25.3
  Top Layer w0.152: U2.14 13.62,55.341 15.367,53.594 28.967,53.594 31.369,55.996 31.369,57.912 30.67,58.611 IC1.12
NetIC1_13: IC1.13 R18.1 | length 5.2
  Top Layer w0.152: R18.1 29.337,57.531 IC1.13
NetIC1_14: IC1.14 R17.1 | length 5.3
  Top Layer w0.152: R17.1 29.209,55.753 IC1.14
NetIC1_16: IC1.16 R16.1 | length 4.4
  Top Layer w0.152: R16.1 33.528,55.017 IC1.16
NetIC1_23: IC1.23 U2.5 | length 41.2
  Top Layer w0.152: U2.5 9.62,71.699 10.069,71.25 10.284,71.25 17.653,63.881 24.257,63.881 v1(24.892,63.246) ; v1(31.75,60.071) 38.119,60.071 42.098,56.092 42.098,55.445 IC1.23
  Bottom Layer w0.152: v1(24.892,63.246) 29.972,63.246 31.75,61.468 v1(31.75,60.071)
NetIC1_27: IC1.27 R4.1 | length 5.1
  Top Layer w0.152: IC1.27 49.212,58.611 50.038,57.785 51.135,57.785 R4.1
NetIC1_28: IC1.28 R5.1 | length 4.9
  Top Layer w0.152: IC1.28 48.704,59.881 49.022,59.563 R5.1
NetIC1_29: IC1.29 J14.2 R14.1 | length 41.5
  Top Layer w0.152: IC1.29 51.199,61.151 R14.1 51.308,61.26 51.318,61.26 51.706,61.648 51.706,61.797 51.963,62.054 56.085,62.054 v1(56.769,62.738) ; v1(75.692,76.962) 76.481,77.751 J14.2
  Bottom Layer w0.152: v1(56.769,62.738) 56.769,63.889 57.777,64.897 68.588,64.897 75.565,71.874 75.565,71.882 75.692,72.009 v1(75.692,76.962)
NetIC1_30: IC1.30 J14.5 | length 41.8
  Top Layer w0.152: IC1.30 46.566,62.46 55.094,62.46 v1(56.007,63.373) ; v1(70.104,78.994) 70.719,79.609 79.243,79.609 79.436,79.416 79.436,79.203 79.781,78.858 J14.5
  Bottom Layer w0.152: v1(56.007,63.373) 56.007,64.643 70.017,78.653 70.017,78.907 v1(70.104,78.994)
NetIC1_31: IC1.31 J14.7 R13.1 | length 44
  Top Layer w0.152: IC1.31 51.071,63.691 R13.1 51.262,64.47 51.435,64.643 56.896,64.643 v1(57.658,63.881) ; v1(81.788,76.962) 81.981,77.155 J14.7
  Bottom Layer w0.152: v1(57.658,63.881) 68.707,63.881 v1(81.788,76.962)
NetIC1_36: IC1.36 U3.6 U3.7 | length 67.6
  Top Layer w0.152: v1(43.688,61.849) 43.688,69.596 44.133,70.041 IC1.36 ; v1(56.642,33.655) 56.642,30.353 63.373,23.622 U3.7 U3.6
  Bottom Layer w0.152: v1(43.688,61.849) 44.323,61.214 46.99,61.214 49.784,58.42 49.784,40.513 v1(56.642,33.655)
NetIC1_37: IC1.37 J14.3 R15.1 | length 35.9
  Top Layer w0.152: IC1.37 51.072,71.311 R15.1 51.682,71.081 51.682,70.836 51.857,70.661 54.532,70.661 57.404,73.533 73.914,73.533 77.236,76.855 77.236,78.384 J14.3
NetJ1_1: J1.1 U3.5 | length 40.3
  Top Layer w0.152: J1.1 62.992,36.703 72.136,27.559 72.136,20.066 70.762,18.692 69.919,18.692 U3.5
NetJ2_2: J2.2 U3.8 | length 32
  Top Layer w0.152: J2.2 58.801,37.13 U3.8
NetJ3_2: J3.2 R6.2 | length 12.7
  Top Layer w0.152: R6.2 54.356,68.072 v1(54.864,68.58)
  Bottom Layer w0.152: v1(54.864,68.58) 54.864,68.644 54.61,68.898 54.61,75.946 J3.2
NetJ3_3: J3.3 R7.2 | length 13.1
  Top Layer w0.152: R7.2 54.61,69.723 56.896,72.009 v1(58.801,72.009)
  Bottom Layer w0.152: v1(58.801,72.009) 59.182,72.39 J3.3
NetLED1_2: D1.2 R8.1 | length 3.6
  Top Layer w0.152: R8.1 D1.2
NetLED2_2: D2.2@62.992,65.659 R9.1 | length 3.6
  Top Layer w0.152: R9.1 D2.2@62.992,65.659
NetR16_2: R16.2 U2.3 | length 34.4
  Top Layer w0.152: U2.3 13.62,71.5 14.069,71.051 14.552,71.051 20.574,65.029 v1(20.574,64.643) ; v1(30.226,50.419) 31.469,49.176 R16.2
  Bottom Layer w0.152: v1(20.574,64.643) 20.599,64.618 20.599,56.942 20.599,56.879 20.642,56.837 cw(c20.193,56.388) 20.698,56.772 27.051,50.419 v1(30.226,50.419)
NetR17_2: R17.2 U2.2 | length 20.4
  Top Layer w0.152: U2.2 15.62,71.5 19.431,67.689 v1(19.431,67.183) ; v1(20.193,56.388) 20.828,55.753 R17.2
  Bottom Layer w0.152: v1(19.431,67.183) 19.431,57.15 v1(20.193,56.388)
NetR18_2: R18.2 U2.4 | length 25.3
  Top Layer w0.152: U2.4 11.62,74.231 v1(11.684,74.295) ; v1(21.463,57.912) 21.844,57.531 R18.2
  Bottom Layer w0.152: v1(11.684,74.295) 13.216,74.295 21.463,66.048 v1(21.463,57.912)
RX0: IC1.34 R6.1 | length 5
  Top Layer w0.152: IC1.34 50.681,67.501 51.252,68.072 R6.1
TX0: IC1.35 R7.1 | length 5.1
  Top Layer w0.152: IC1.35 48.197,68.771 49.149,69.723 R7.1
pads on no net: IC1.4 IC1.5 IC1.6 IC1.7 IC1.17 IC1.18 IC1.19 IC1.20 IC1.21 IC1.22 IC1.32 J14.1 J14.8 U2.7 U2.11 U2.12

## Polygon pours and split planes (outlines as drawn)
+3V3 on Top Layer "+3V3_L01_P002" (solid, pour order 2): 75.438,53.34 75.438,48.26 83.633,48.26 87.122,52.832 87.122,75.946 80.645,75.946 78.994,77.597 78.994,79.248 78.359,79.248 78.359,74.93 79.248,74.041 85.217,74.041 85.217,54.102 83.693,52.578 81.661,52.578 80.899,53.34
+5V on Top Layer "+5V_L01_P015" (solid, pour order 15): 75.184,45.339 82.169,45.339 82.169,43.942 82.042,43.815 75.057,43.815 74.93,43.942 74.803,44.323
GND on Top Layer "GND_L01_P014" (solid, pour order 14): 96.393,46.101 96.647,45.847 96.647,44.196 96.393,43.942 91.948,43.942 91.44,43.434 91.44,42.418 92.202,41.656 96.901,41.656 97.917,42.672 97.917,46.863 97.028,47.752 91.694,47.752 91.694,46.355 91.948,46.101
GND on Top Layer "GND_L01_P013" (solid, pour order 13): 89.281,59.436 89.281,55.372 90.932,55.245 93.091,57.404 99.822,57.404 100.965,58.547 100.965,60.579 99.568,60.579 96.901,63.246 94.361,63.246 94.361,61.087 93.091,59.817 89.535,59.817 89.408,59.69
GND on Top Layer "GND_L01_P012" (solid, pour order 12): 109.22,53.594 109.22,40.259 108.839,39.878 100.076,39.878 100.076,52.451 101.219,53.594
+3V3 on Top Layer "+3V3_L01_P007" (solid, pour order 7): 23.241,68.834 21.717,68.834 20.32,70.231 20.32,71.882 33.909,71.882 33.909,70.739 24.384,70.739 23.241,69.596
+3V3 on Top Layer "+3V3_L01_P006" (solid, pour order 6): 10.795,58.801 10.795,58.674 10.795,56.261 9.398,54.864 9.398,50.546 25.781,50.546 26.924,49.403 26.924,48.387 29.21,48.387 29.21,51.943 10.795,51.943 10.795,55.245 11.557,55.245 12.446,56.134 12.446,58.801
+3V3 on Top Layer "+3V3_L01_P005" (solid, pour order 5): 52.811,79.354 52.959,75.946 52.959,73.787 49.657,73.66 49.403,73.406 49.403,72.263 49.657,72.263 49.911,72.263 52.07,72.263 52.07,71.12 53.467,71.12 54.991,72.644 54.991,79.375 52.832,79.375
GND on Top Layer "GND_L01_P004" (solid, pour order 4): 33.02,69.342 33.02,61.595 33.655,60.96 39.624,60.96 41.275,62.611 41.275,69.723 33.401,69.723
GND on Top Layer "GND_L01_P003" (solid, pour order 3): 82.55,48.006 82.55,45.847 77.597,45.847 75.184,45.847 73.406,44.069 73.406,43.053 77.851,43.053 78.359,43.561 84.201,43.561 84.201,46.863 89.789,46.863 89.789,44.704 86.868,41.783 80.01,41.783 78.359,40.132 70.358,40.132 66.167,44.323 66.167,49.784 67.056,50.673 73.279,50.673 73.279,49.53 73.279,48.133 75.184,47.625 75.565,48.006
+5V on Top Layer "+5V_L01_P001" (solid, pour order 1): 29.692,19.812 26.797,19.812 26.797,14.351 84.455,14.351 89.789,19.685 90.424,19.685 90.424,14.859 101.473,14.859 101.473,20.574 98.171,23.876 98.171,39.243 96.266,41.148 91.821,41.148 90.932,42.037 90.932,43.815 91.44,44.323 96.393,44.323 96.393,45.847 91.313,45.847 89.408,43.942 89.408,40.894 87.757,40.894 86.995,40.132 86.995,38.862 87.63,38.862 88.011,38.862 94.361,38.862 94.361,22.479 89.281,22.479 84.074,17.272 29.692,17.246
+12V on Top Layer "+12V_L01_P000" (solid, pour order 0): 17.526,6.858 14.986,6.858 12.7,6.858 12.7,1.651 13.843,0.508 108.839,0.508 110.363,2.032 110.363,58.547 104.902,64.008 104.902,67.691 104.267,68.326 99.568,68.326 97.028,65.786 90.805,65.786 90.805,64.389 99.822,64.389 102.489,61.722 102.489,59.69 94.234,51.435 91.948,51.435 91.948,49.53 92.202,49.276 96.647,49.276 102.108,54.737 108.966,54.737 109.474,54.229 109.474,10.414 106.172,7.112 103.124,4.064 92.075,4.064 92.075,5.588 92.075,6.858 90.805,6.858 89.154,6.858 89.154,5.207 88.011,4.064 77.851,4.064 77.851,4.699 77.851,7.112 75.438,7.112 73.914,7.112 73.914,5.08 72.771,3.937 62.376,3.937 62.338,6.985 60.833,6.985 59.27,6.985 58.633,6.985 58.468,4.064 46.101,4.064 46.101,7.112 43.053,7.112 43.053,5.08 43.053,4.318 42.291,4.318 30.988,4.318 30.988,5.842 30.988,6.858 29.972,6.858 28.067,6.858 28.067,5.588 28.067,4.318 17.526,4.318
GND on Bottom Layer "GND_L02_P011" (solid, pour order 11): 27.94,73.66 27.94,80.391 6.858,80.391 0.254,73.787 0.254,7.493 6.913,0.834 103.069,0.834 111.379,9.144 111.379,79.248 110.49,80.137 48.768,80.137 48.768,73.025 28.321,73.025 28.321,73.279
+5V on Bottom Layer "+5V_L02_P010" (solid, pour order 10): 80.899,44.958 80.899,44.855 80.899,43.688 84.074,43.688 88.347,39.415 89.692,40.356 89.535,40.513 85.09,44.958
+3V3 on Bottom Layer "+3V3_L02_P009" (solid, pour order 9): 32.565,72.486 32.258,72.179 32.258,70.612 34.163,70.612 35.306,71.755 50.673,71.755 51.181,72.263 53.086,72.263 53.467,71.882 53.467,60.579 59.69,60.579 68.199,52.07 75.438,52.07 75.438,53.594 68.58,53.594 60.325,61.849 54.229,61.849 54.229,73.152 53.975,73.406 50.038,73.406 49.403,72.771 32.85,72.771
+3V3 on Bottom Layer "+3V3_L02_P008" (solid, pour order 8): 21.844,69.977 21.844,61.722 26.797,56.769 26.797,51.308 27.178,50.927 28.702,50.927 28.702,57.15 22.987,62.865 22.987,69.977

## Silkscreen, mask and mechanical layers (free items; w line width, h text height)
Top Overlay:
  drawing of 11 lines, arcs and shapes, not listed
  text "+3V3" at 51.816,74.338 h1.02 r90
  text "RX" at 57.023,73.957 h1.02 r90
  text "TX" at 59.69,73.83 h1.02 r90
  text "IO0" at 62.23,73.66 h1.02 r90
  text "GND" at 64.77,73.322 h1.02 r90
  text "TX" at 60.325,67.902 h1.02 r270
  text "RX" at 65.024,67.775 h1.02 r270
  text "Power" at 89.027,63.626 h1.02 r270
  text "Power" at 78.486,60.07 h1.02 r270
  text "BOOT" at 44.45,39.413 h1.02 r90
  text "RESET" at 25.146,39.159 h1.02 r90
  text "Power" at 89.027,36.067 h1.02 r270
  text "IO2" at 7.239,31.369 h1.02
  text "IO4" at 7.239,28.702 h1.02
  text "IO21" at 6.901,26.035 h1.02
  text "GND" at 7.028,23.622 h1.02
  text "GND" at 7.028,21.082 h1.02
  text "GND" at 7.028,18.415 h1.02
  text "GND" at 86.403,13.97 h1.02
  text "+12V" at 59.309,12.445 h1.02 r270
  text "+12V" at 74.549,12.318 h1.02 r270
  text "+12V" at 90.297,12.318 h1.02 r270
  text "+12V" at 13.208,12.191 h1.02 r270
  text "+12V" at 28.448,12.191 h1.02 r270
  text "+12V" at 44.069,12.191 h1.02 r270
  text "GND" at 82.55,11.387 h1.02 r270
  text "GND" at 97.917,11.387 h1.02 r270
  text "GND" at 5.334,11.26 h1.02 r270
  text "GND" at 21.082,11.26 h1.02 r270
  text "GND" at 36.322,11.26 h1.02 r270